# Altium PCB PCB1.PcbDoc
Units mil, origin at the board's own origin, x right, y up, seen from the top; angles counter-clockwise.
Board outline 1800 x 1800 mil, 2 copper layers (Top Layer, Bottom Layer); 11 components, 9 nets, 42 pads, 5 vias.
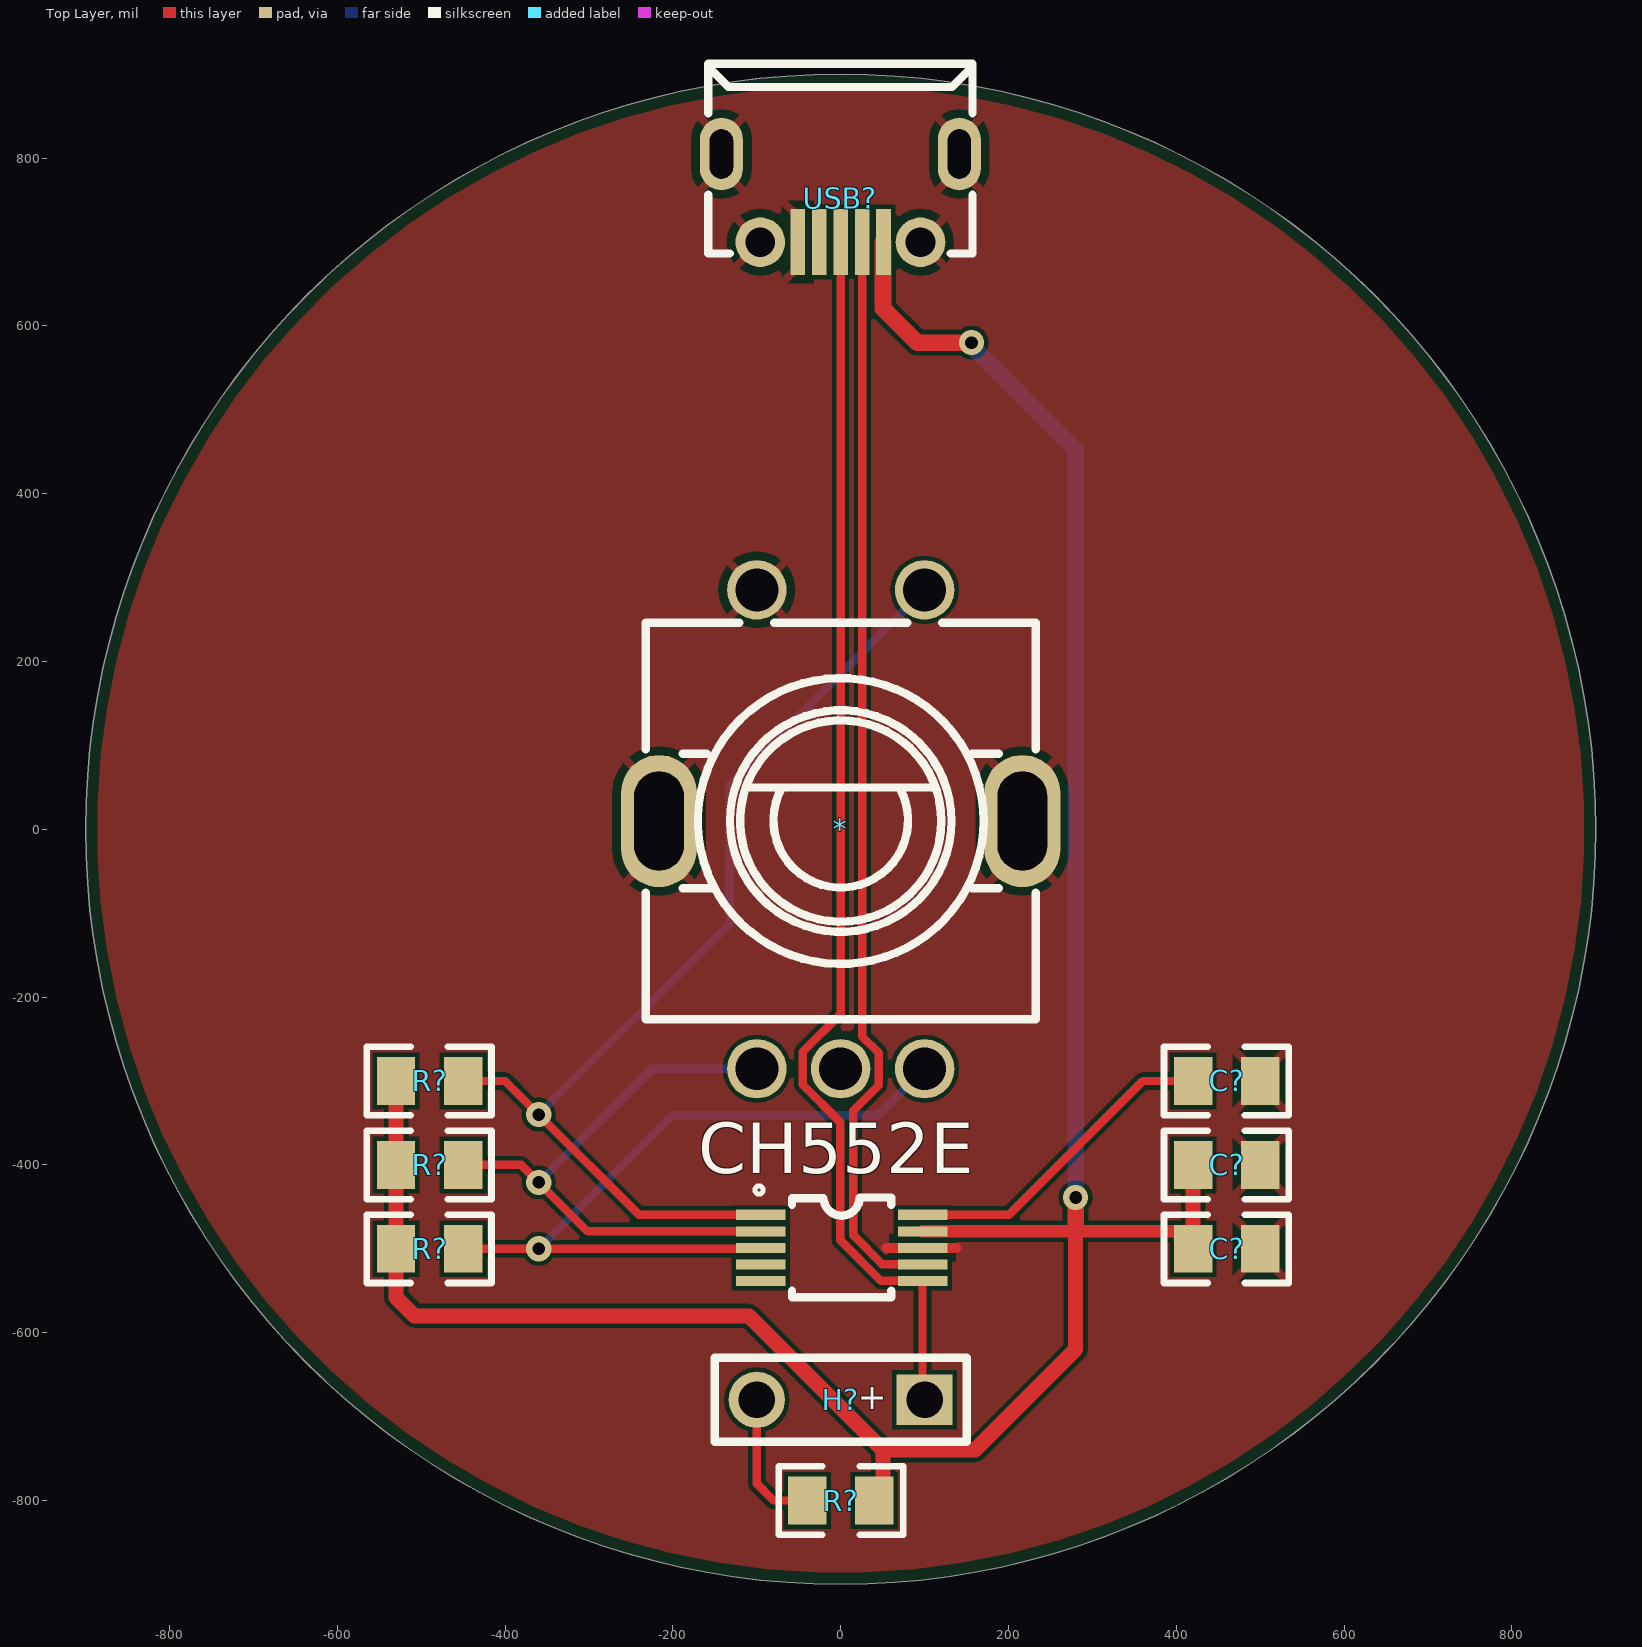
[diagram p0: Top Layer view]
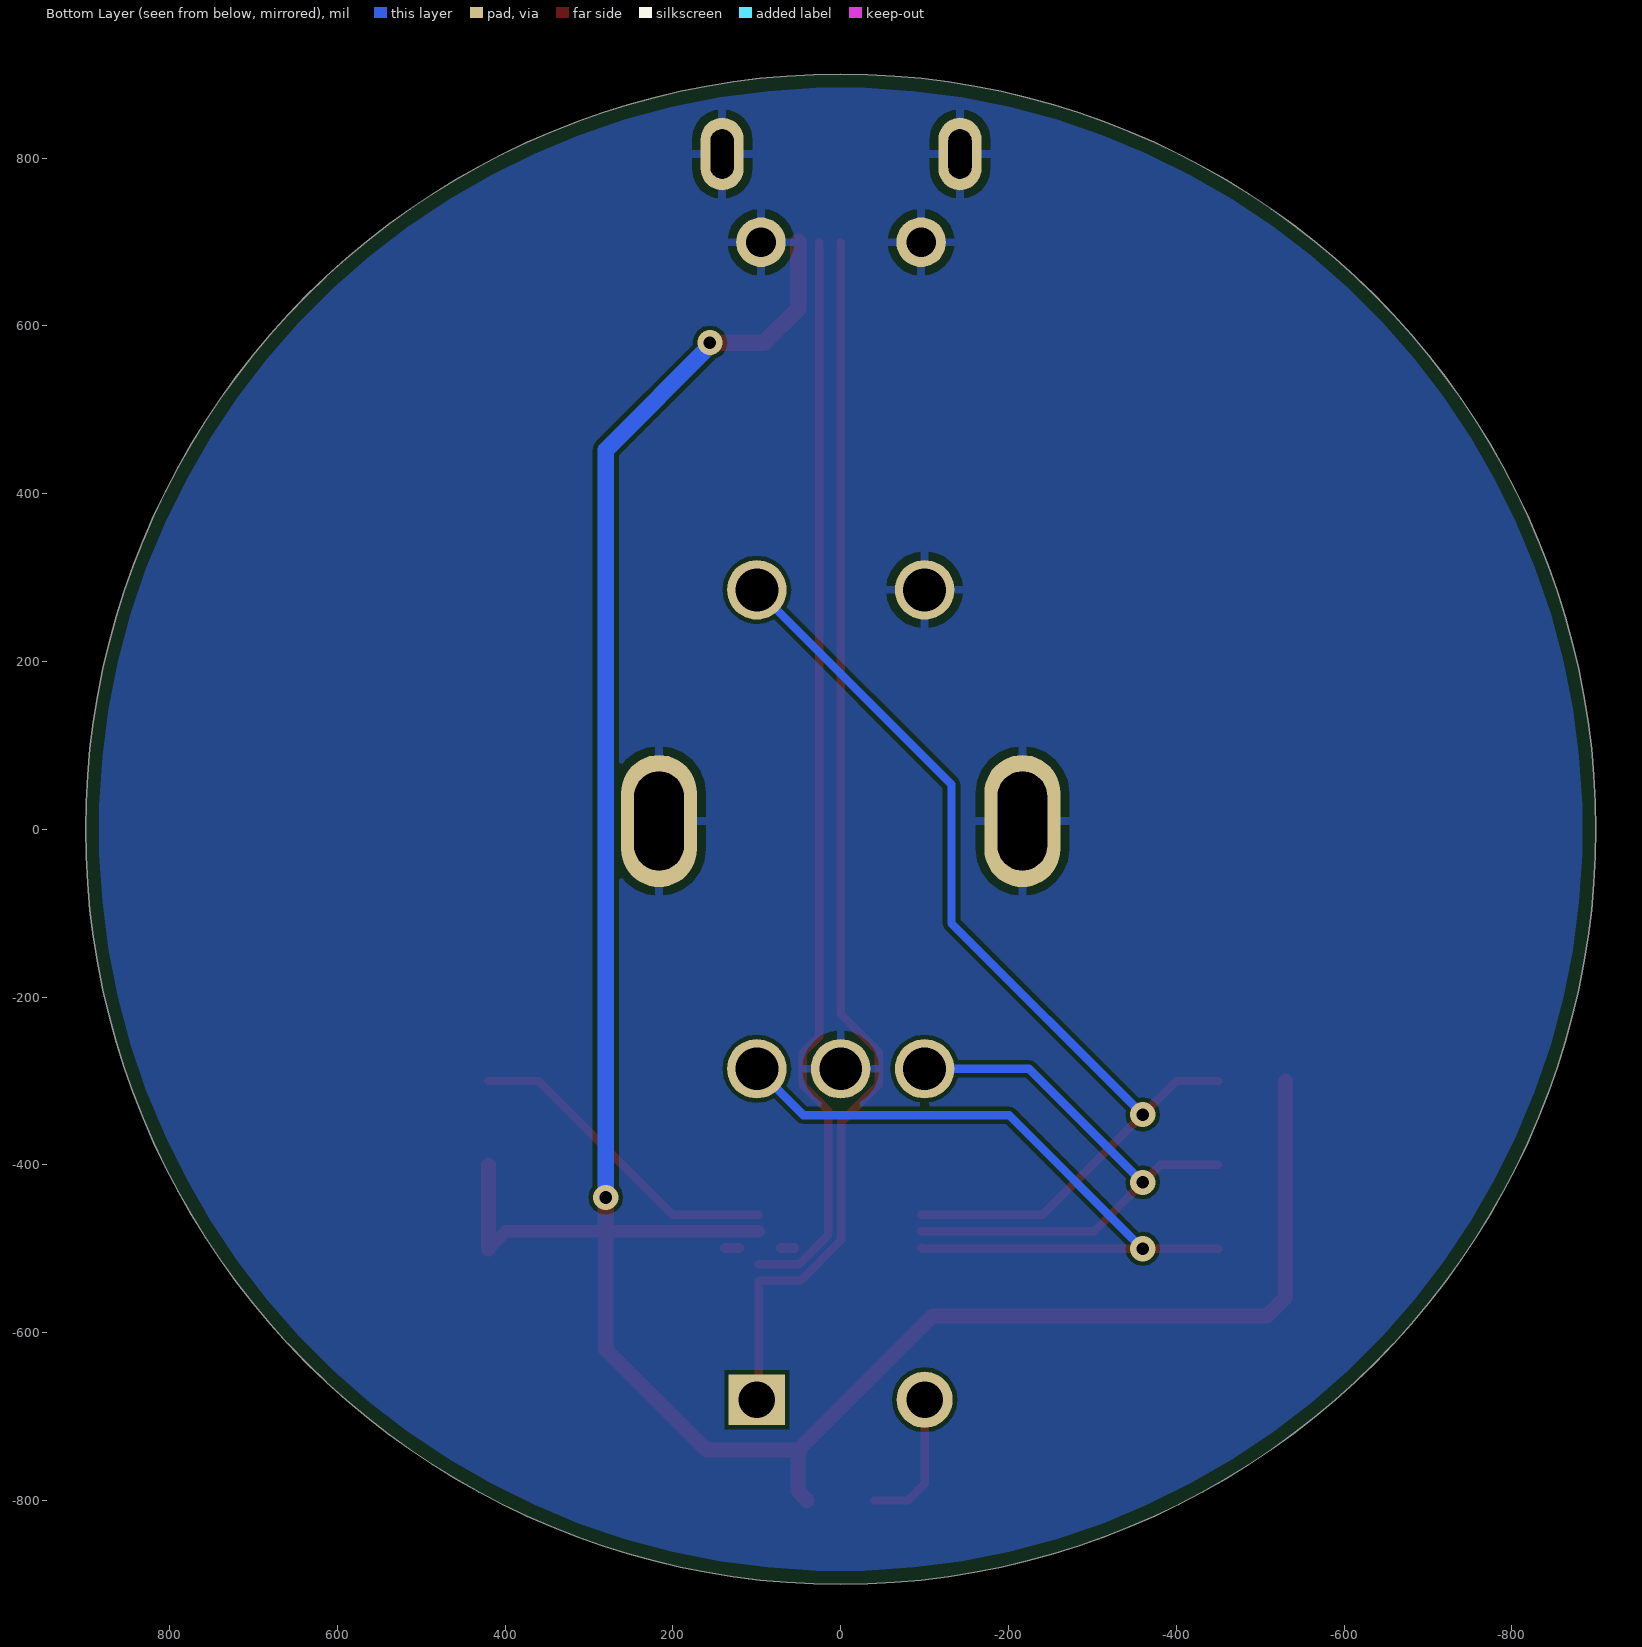
[diagram p1: Bottom Layer view, seen from below]

## Layer stack, top to bottom
Top Solder: solder mask 0.4, Solder Resist, Dk 3.5
Top Layer: signal copper 1.4
Dielectric 1: dielectric 12.6, FR-4, Dk 4.8
Bottom Layer: signal copper 1.4
Bottom Solder: solder mask 0.4, Solder Resist, Dk 3.5

## Board outline
-900,0 ccw(c0,0) 0,-900 ccw(c0,0) 900,0 ccw(c0,0) 0,900 ccw(c0,0)

## Design rules (kind name [scope] priority, off if disabled: settings)
Clearance [All] p1: gap=5 ignorepadtopadclearanceinfootprint=FALSE
PolygonConnect PolygonConnect_1 [All vs IsNamedPolygon('Top Layer-GND')] p1: thpad.connectstyle=Relief thpad.reliefconductorwidth=10 thpad.reliefentries=4 thpad.polygonreliefangle="45 Angle" thpad.airgapwidth=10 smdpad.connectstyle=Relief smdpad.reliefconductorwidth=10 smdpad.reliefentries=4 smdpad.polygonreliefangle="45 Angle" smdpad.airgapwidth=10 via.connectstyle=Relief via.reliefconductorwidth=10 via.reliefentries=4 via.polygonreliefangle="90 Angle" via.airgapwidth=10
PolygonConnect [All] p2: connectstyle=Relief reliefconductorwidth=10 reliefentries=4 polygonreliefangle="90 Angle" airgapwidth=10
RoutingVias [All] p1: holewidth=15 width=30 viastyle="Through Hole" minholewidth=5 minwidth=10 maxholewidth=30 maxwidth=50
SolderMaskExpansion [All] p1: expansion=4
Width [All] p1: maxlimit=30 minlimit=10 preferedwidth=10
30 further rules are at their usual default settings.

## Classes and differential pairs
component class Sheet1: 10k * C? CH552E H? R? USB?

## Components (designator, comment, footprint, x,y, rotation, side; value= is the part's Value field where it differs from the comment)
* "旋转编码器" SW-TH_EC11XXXXXXXX 0,0 r0 top
C? "0.1uf" 0805CAP 460,-300 r0 top
C? "0.1uf" 0805CAP 460,-500 r0 top
C? "10uf" 0805CAP 460,-400 r0 top
CH552E "ch552e" ch552e 0,-500 r270 top (schematic designator *)
H? "BAT" BAT 0,-680 r180 top
R? "10K" 0805R -490,-300 r0 top
R? "10K" 0805R -490,-400 r0 top
R? "10K" 0805R -490,-500 r0 top
R? "1K" 0805R 0,-800 r180 top
USB? "USB" "micro usb" 51.18,700 r90 top

## Footprints (in the part's own frame and the unit in brackets; to place one, negate y for a bottom-side part, rotate by r counter-clockwise, add the part's x,y. Pads: shape width x height; smd on the part's side, far side on the other; paste and mask are expansions set on the pad)
0805CAP [mm]
  rect 1.16x1.45 smd: 1(-1.016,0) 2(1.016,0)
  silkscreen extent -1.9,-1.03 1.87,1.04
0805R [mm]
  rect 1.16x1.45 smd: 1(-1.016,0) 2(1.016,0)
  silkscreen extent -1.9,-1.03 1.87,1.04
BAT [mm]
  rect 1.7x1.524 hole 1.1: 1(-2.54,0)
  round 1.7 hole 1.1: 2(2.54,0)
  silkscreen extent -3.81,-1.27 3.81,1.27
ch552e [mil]
  rect 12x59.06 smd: 1(-40.55,-95.47) 2(-20.86,-95.47) 3(-1.18,-95.47) 4(18.51,-95.47) 5(38.19,-95.47) 6(38.19,97.53) 7(18.51,97.53) 8(-1.18,97.53) 9(-20.86,97.53) 10(-40.55,97.53)
  silkscreen extent -75,-102 58,60
"micro usb" [mm]
  rect 2x0.45 smd: 1(0,0) 2(0,0.65) 3(0,1.3) 4(0,1.95) 5(0,2.6)
  round 1.5 hole 0.9: 6(-0.008,3.735) 9(-0.008,-1.115)
  oval 2.199x1.3 hole 0.7 slot 1.5 at 0 deg: 7(2.662,4.91) 8(2.662,-2.29)
  silkscreen extent -0.35,-2.69 5.4,5.31
SW-TH_EC11XXXXXXXX [mm]
  oval 2.3x4 hole 1.5 slot 3 at 90 deg: 6(5.5,0.25) 7(-5.5,0.25)
  round 1.8 hole 1.3: A(-2.54,-7.25) B(2.54,-7.25) C(0,-7.25) D(-2.54,7.25) E(2.54,7.25)
  silkscreen extent -5.9,-5.75 5.9,6.25

## Part data
C? C? C?: library part CAP
R? R? R? R?: library part RES
USB?: library part micro_usb

## Via types
v1: diameter 30, hole 15, Top Layer to Bottom Layer, 5 vias

## Nets (pads, with @x,y where several pads share a name; then routed paths per layer and width w, separated by ;. In a path a pad name is that pad's centre, name@x,y a point inside that pad or via, vN(x,y) a via of type N, cw(c..) or ccw(c..) an arc to the next point about the centre after c; other vN are vias at no path point)
+5: C?.1@420,-400 C?.1@420,-500 CH552E.9 R?.1 USB?.1 | length 3147
  Top Layer w15: CH552E.9 280,-479.14 399.14,-479.14 C?.1@420,-500
  Top Layer w18: R?.1@-530,-300 -530,-400 -530,-500 -530,-557.88 -507.88,-580 -109.44,-580 50.56,-740 ; R?.1@40,-800 50.56,-789.44 50.56,-740 ; 280,-479.14 280,-620 160,-740 50.56,-740 ; C?.1@420,-500 C?.1@420,-400
  Top Layer w20: USB?.1@50.53,700 50.53,620.65 91.18,580 v1(155.89,580) ; 280,-479.14 v1(280,-438.82)
  Bottom Layer w20: v1(155.89,580) 151.99,580 280,451.99 v1(280,-438.82)
d+: CH552E.6 H?.1 USB?.3 | length 1488
  Top Layer w10: USB?.3 0,-220 -45.44,-265.44 -45.44,-304.25 -0.55,-349.14 -0.55,-489.48 48.16,-538.19 CH552E.6 97.53,-677.53 H?.1
d-: CH552E.7 USB?.2 | length 1301.5
  Top Layer w10: USB?.2 25.59,-246.78 45.43,-266.62 45.43,-304.99 15,-335.42 15,-483.82 49.69,-518.51 CH552E.7
GND: *.6 *.7 *.C *.D C?.2 CH552E.8 USB?.5 USB?.6 USB?.7 USB?.8 USB?.9 | length 34.1
  Top Layer w12: 54.85,-498.82 CH552E.8@71.16,-498.82 ; CH552E.8@120.39,-498.82 138.21,-498.82
Net*_10: C?.1@420,-300 CH552E.10 | length 388.5
  Top Layer w10: CH552E.10 200.55,-459.45 360,-300 C?.1@420,-300
NetH?_2: H?.2 R?.2@-40,-800 | length 168.3
  Top Layer w10: H?.2 -100,-780 -80,-800 R?.2@-40,-800
p1.4: *.E CH552E.1 R?.2@-450,-300 | length 1236.5
  Top Layer w10: R?.2@-450,-300 -400,-300 v1(-360,-340) -240.55,-459.45 CH552E.1
  Bottom Layer w10: v1(-360,-340) -132.08,-112.08 -132.08,53.36 *.E
p1.5: *.A CH552E.2 R?.2@-450,-400 | length 703.4
  Top Layer w10: R?.2@-450,-400 -380.8,-400 v1(-360,-420.8) -301.66,-479.14 CH552E.2
  Bottom Layer w10: v1(-360,-420.8) -224.63,-285.43 *.A
p1.6: *.B CH552E.3 R?.2@-450,-500 | length 903.9
  Top Layer w10: R?.2@-450,-500 v1(-360,-500) -96.65,-500 CH552E.3
  Bottom Layer w10: v1(-360,-500) -200.74,-340.74 44.69,-340.74 *.B
pads on no net: CH552E.4 CH552E.5 USB?.4

## Polygon pours and split planes (outlines as drawn)
GND on Bottom Layer "Bottom Layer-GND" (solid, pour order 9): -883.63,0 ccw(c0,0) 0,-883.63 ccw(c0,0) 883.63,0 ccw(c0,0) 0,883.63 ccw(c0,0)
GND on Top Layer "Top Layer-GND" (solid, pour order 7): -885.66,0 ccw(c0,0) 0,-885.66 ccw(c0,0) 885.66,0 ccw(c0,0) 0,885.66 ccw(c0,0)

## Silkscreen, mask and mechanical layers (free items; w line width, h text height)
Bottom Solder:
  circle w10: c0,0 r900
Mechanical 1:
  circle w10: c0,0 r900

## Text inside footprints (layer, text, board x,y; h text height)
H?: Top Overlay "+" at 55,-665 h30 r180